# Altium PCB ftcan2.PcbDoc
Units mm, origin at the board's own origin, x right, y up, seen from the top; angles counter-clockwise.
Board outline 52 x 31 mm, 2 copper layers (Top Layer, Bottom Layer); 35 components, 33 nets, 184 pads, 46 vias.
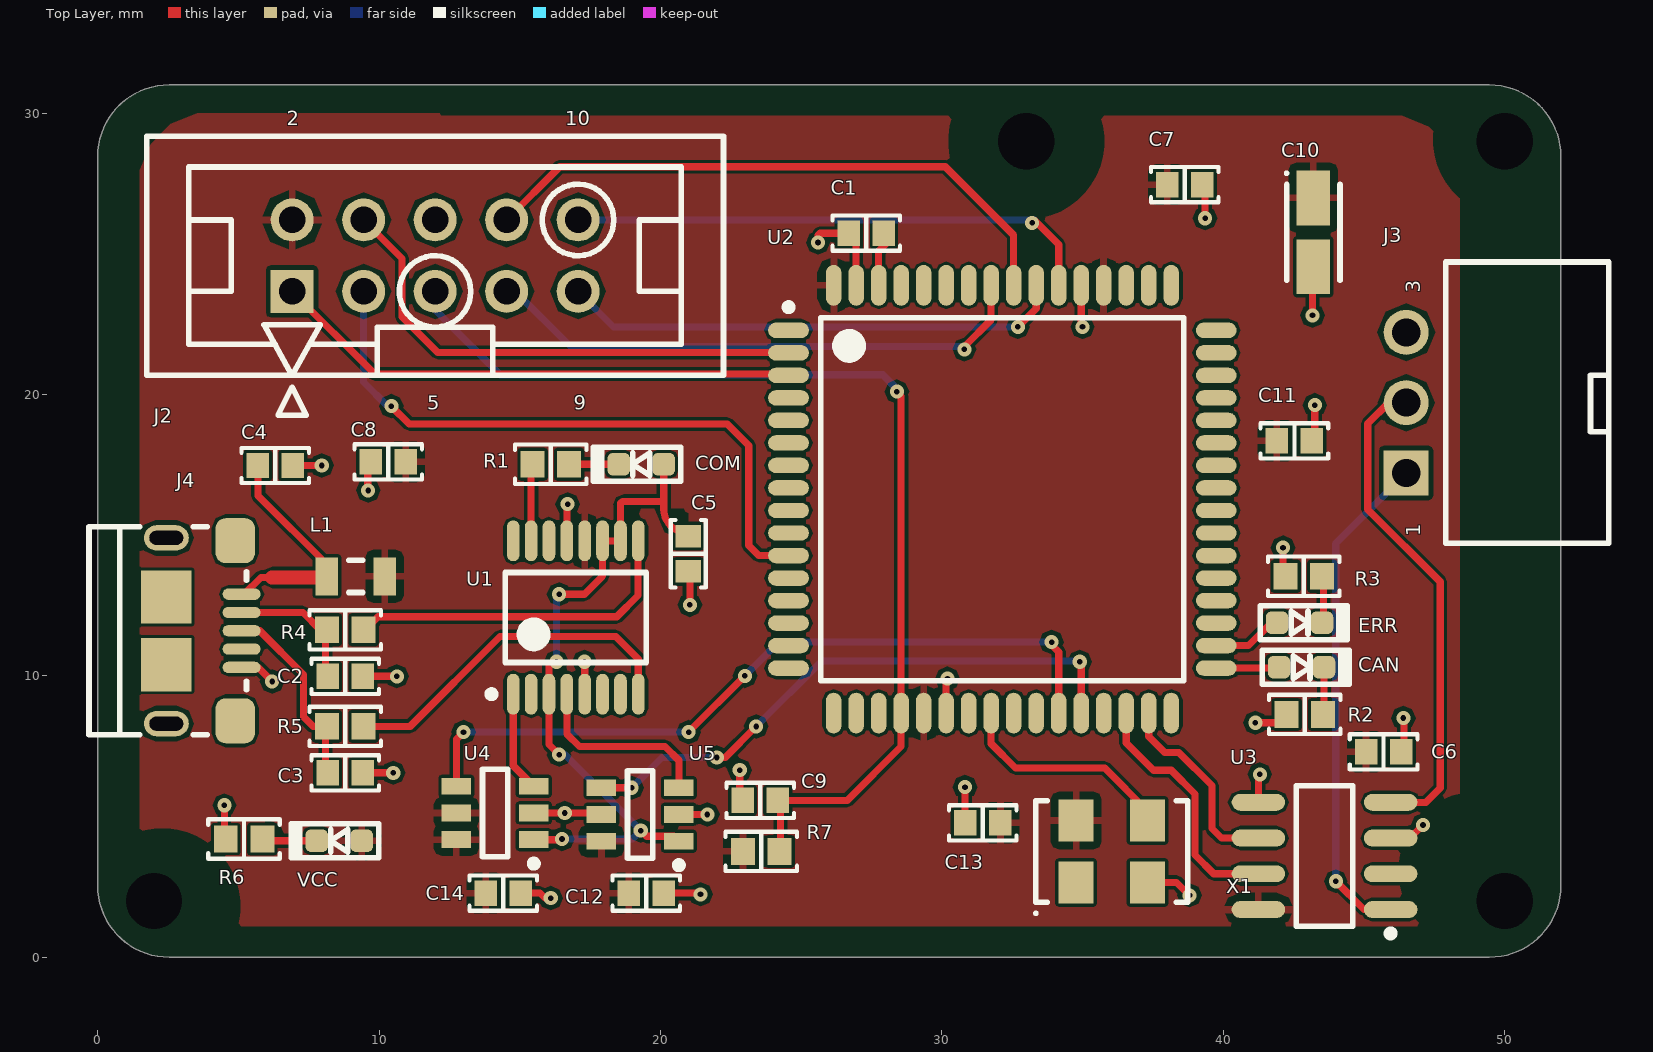
[diagram p0: Top Layer view]
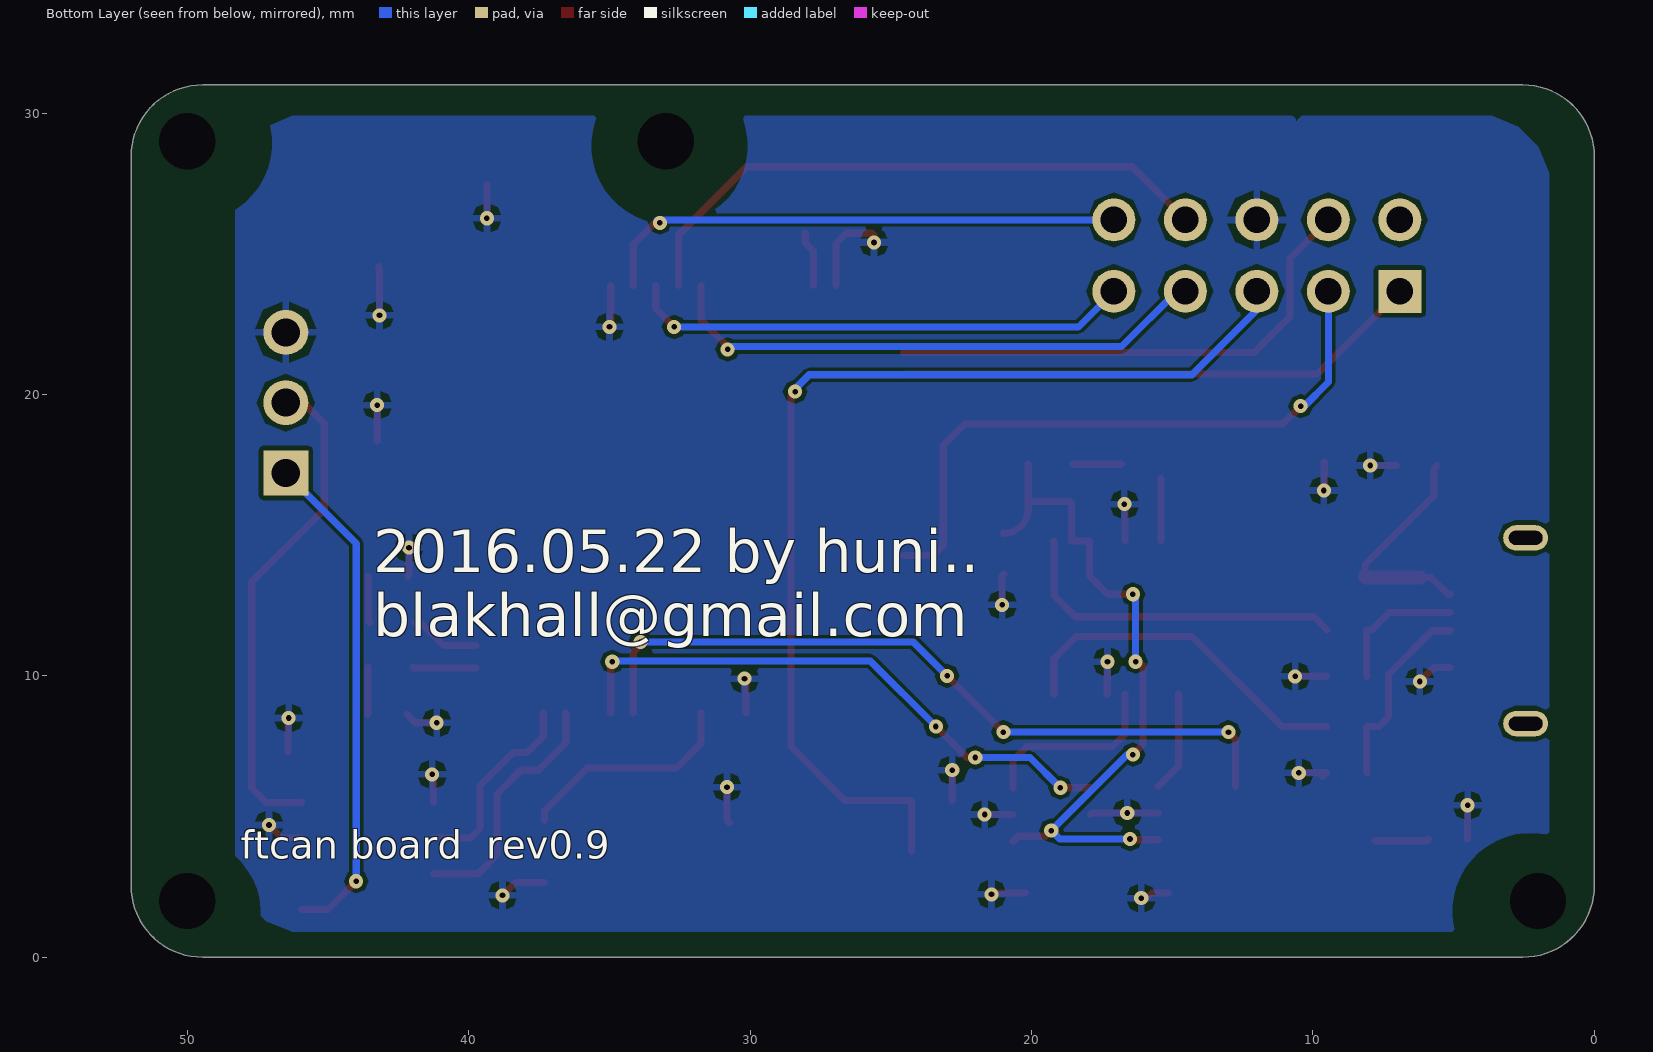
[diagram p1: Bottom Layer view, seen from below]
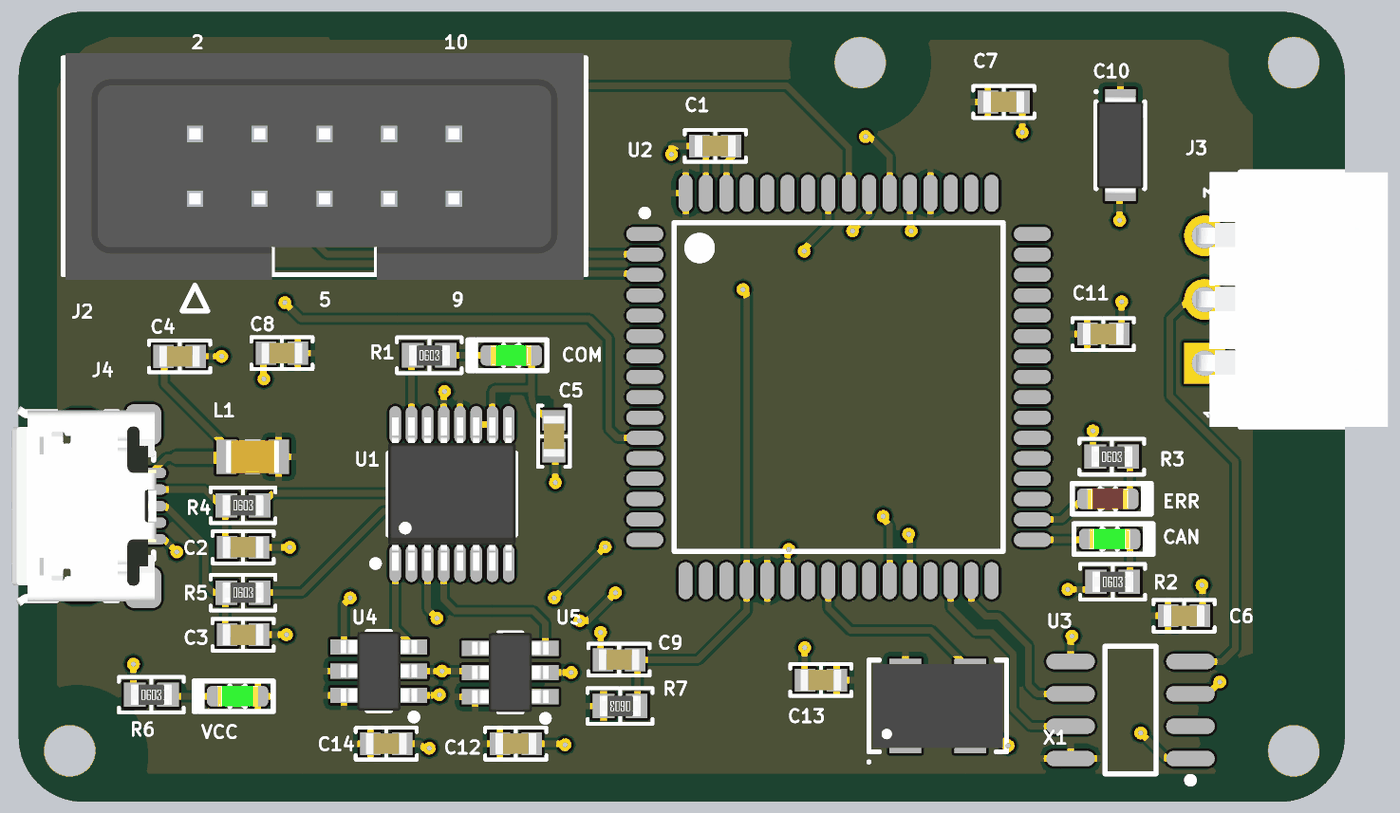
[diagram p2: 3D render of the assembled board from above, using the file's embedded part models]

## Layer stack, top to bottom
Top Solder: solder mask 0.0102, Solder Resist, Dk 3.5
Top Layer: signal copper 0.0356
Dielectric 1: dielectric 0.32, FR-4, Dk 4.8
Bottom Layer: signal copper 0.0356
Bottom Solder: solder mask 0.0102, Solder Resist, Dk 3.5

## Board outline
0,28.46 cw(c2.54,28.46) 2.54,31 49.46,31 cw(c49.46,28.46) 52,28.46 52,2.54 cw(c49.46,2.54) 49.46,0 2.54,0 cw(c2.54,2.54) 0,2.54

## Design rules (kind name [scope] priority, off if disabled: settings)
Clearance [All] p1: gap=0.1 ignorepadtopadclearanceinfootprint=FALSE except(0: Arc-Hole Track-Hole SMDPad-Hole THPad-Hole Via-Hole Fill-Hole Poly-Hole Region-Hole Text-Hole; 0.15: SMDPad-Text THPad-Fill THPad-Poly THPad-Region Via-Fill Via-Poly Via-Region)
MinimumSolderMaskSliver [All] p1 off: minsoldermaskwidth=0.254
PolygonConnect [All] p1: connectstyle=Relief reliefconductorwidth=0.254 reliefentries=4 polygonreliefangle="90 Angle" airgapwidth=0.254
RoutingVias RoutingVias_1 [All] p1: holewidth=0.2 width=0.5 viastyle="Through Hole" minholewidth=0.1 minwidth=0.1 maxholewidth=0.711 maxwidth=1.27
SilkToSilkClearance [All] p1: silktosilkclearance=0.1
SilkToSolderMaskClearance [IsPad] p1 off: minsilkscreentomaskgap=0.1 clearancetoexposedcopper=TRUE
SolderMaskExpansion [All] p1: expansion=0.102
Width [All] p1: maxlimit=10.254 minlimit=0.1 preferedwidth=0.254 minimp=50.000000 maximp=50.000000 favimp=50.000000
27 further rules are at their usual default settings.

## Components (designator, comment, footprint, x,y, rotation, side; value= is the part's Value field where it differs from the comment)
C1 "105" "CAP 0603/1608 RF" 27.315,25.731 r0 top
C2 "47pF" "CAP 0603/1608 RF" 8.798,9.983 r180 top
C3 "47pF" "CAP 0603/1608 RF" 8.798,6.554 r180 top
C4 "104" "CAP 0603/1608 RF" 6.311,17.476 r180 top
C5 "104" "CAP 0603/1608 RF" 20.987,14.34 r90 top
C6 "105" "CAP 0603/1608 RF" 45.7,7.3 r180 top
C7 "105" "CAP 0603/1608 RF" 38.629,27.458 r180 top
C8 "105" "CAP 0603/1608 RF" 10.322,17.603 r0 top
C9 "105" "CAP 0603/1608 RF" 23.543,5.574 r0 top
C10 "10uF/3216" CAPMP3216X18N 43.201,25.762 r90 top value=1n
C11 "105" "CAP 0603/1608 RF" 42.529,18.351 r180 top
C12 "105" "CAP 0603/1608 RF" 19.494,2.279 r180 top
C13 "105" "CAP 0603/1608 RF" 31.457,4.776 r0 top
C14 "105" "CAP 0603/1608 RF" 14.414,2.279 r180 top
CAN "G" LED-1608(Green) 41.982,10.307 r0 top
COM "G" LED-1608(Green) 20.115,17.519 r180 top
ERR "R" LED-1608(red) 41.911,11.888 r0 top
J2 "87759-10xx" HIF3F-10PA-2.54DSA 6.91,23.662 r0 top
J3 "SMW250-03" SMAW250-03P 46.503,17.208 r90 top
J4 "MICROUSB-B" "FCI USB 10118193-0001LF" 2.489,11.602 r90 top
L1 "1uH" CAPC2012X05N 9.17,13.539 r0 top
R1 "4.7k" "RES 0603/1608" 16.102,17.519 r0 top
R2 "4.7k" "RES 0603/1608" 42.899,8.629 r0 top
R3 "4.7k" "RES 0603/1608" 42.865,13.539 r0 top
R4 "27" "RES 0603/1608" 8.798,11.634 r0 top
R5 "27" "RES 0603/1608" 8.798,8.205 r0 top
R6 "4.7k" "RES 0603/1608" 5.2,4.2 r0 top
R7 "4.7k" "RES 0603/1608" 23.583,3.76 r180 top
U1 "FT230x" SOP64P600X178-16N 16.99,12.073 r90 top
U2 "AT90CAN128" 64A_L 32.152,16.276 r0 top
U3 "TJF1051T" 8S1_L 43.6,3.6 r180 top
U4 "74LVC1T45" SOT95P285X130-6N 14.123,5.127 r180 top
U5 "74LVC1T45" SOT95P285X130-6N 19.277,5.073 r180 top
VCC "G" LED-1608(Green) 9.382,4.141 r180 top
X1 "SCO53-16Mhz-5.0V" SCO-53 36.041,3.76 r90 top

## Footprints (in the part's own frame and the unit in brackets; to place one, negate y for a bottom-side part, rotate by r counter-clockwise, add the part's x,y. Pads: shape width x height; smd on the part's side, far side on the other; paste and mask are expansions set on the pad)
8S1_L [mm] "8-Pin Small Outline Integrated Circuit 1.27 mm Pitch, IPC High Density"
  oval 1.9x0.6 smd: 1(-2.35,1.905) 2(-2.35,0.635) 3(-2.35,-0.635) 4(-2.35,-1.905) 5(2.35,-1.905) 6(2.35,-0.635) 7(2.35,0.635) 8(2.35,1.905)
  silkscreen extent -2.48,-2.5 1,2.88, body extent -1.95,-2.45 1.95,2.45, height 1.73
64A_L [mm] "64-Pin Thin Quad Flat Pack 0.8 mm Pitch, IPC High Density"
  oval 1.45x0.55 smd: 1(-7.6,6) 2(-7.6,5.2) 3(-7.6,4.4) 4(-7.6,3.6) 5(-7.6,2.8) 6(-7.6,2) 7(-7.6,1.2) 8(-7.6,0.4) 9(-7.6,-0.4) 10(-7.6,-1.2) 11(-7.6,-2) 12(-7.6,-2.8) 13(-7.6,-3.6) 14(-7.6,-4.4) 15(-7.6,-5.2) 16(-7.6,-6) 33(7.6,-6) 34(7.6,-5.2) 35(7.6,-4.4) 36(7.6,-3.6) 37(7.6,-2.8) 38(7.6,-2) 39(7.6,-1.2) 40(7.6,-0.4) 41(7.6,0.4) 42(7.6,1.2) 43(7.6,2) 44(7.6,2.8) 45(7.6,3.6) 46(7.6,4.4) 47(7.6,5.2) 48(7.6,6)
  oval 0.55x1.45 smd: 17(-6,-7.6) 18(-5.2,-7.6) 19(-4.4,-7.6) 20(-3.6,-7.6) 21(-2.8,-7.6) 22(-2,-7.6) 23(-1.2,-7.6) 24(-0.4,-7.6) 25(0.4,-7.6) 26(1.2,-7.6) 27(2,-7.6) 28(2.8,-7.6) 29(3.6,-7.6) 30(4.4,-7.6) 31(5.2,-7.6) 32(6,-7.6) 49(6,7.6) 50(5.2,7.6) 51(4.4,7.6) 52(3.6,7.6) 53(2.8,7.6) 54(2,7.6) 55(1.2,7.6) 56(0.4,7.6) 57(-0.4,7.6) 58(-1.2,7.6) 59(-2,7.6) 60(-2.8,7.6) 61(-3.6,7.6) 62(-4.4,7.6) 63(-5.2,7.6) 64(-6,7.6)
  silkscreen extent -7.72,-6.45 6.45,6.95, body extent -7,-7 7,7, height 1.2
"CAP 0603/1608 RF" [mm] "Chip Capacitor, 2-Leads, Body 1.60x0.80mm, IPC High Density"
  rect 0.8x0.9 smd: 1(-0.625,0) 2(0.625,0)
  silkscreen extent -1.2,-0.63 1.2,0.63, body extent -0.8,-0.41 0.8,0.41, height 0.82
CAPC2012X05N [mm] "Chip Capacitor, 2-Leads, Body 2.00x1.20mm, IPC Medium Density"
  rect 0.8x1.35 smd: 1(-1.025,0) 2(1.025,0)
  silkscreen extent -0.25,-0.58 0.25,0.58, body extent -1.05,-0.65 1.05,0.65, height 0.5
CAPMP3216X18N [mm] "Molded Capacitor, 2-Leads, Body 3.20x1.60mm, IPC Medium Density"
  rect 1.95x1.2 smd: 1(1.225,0) 2(-1.225,0)
  silkscreen extent -1.7,-0.95 2.15,1, body extent -1.92,-0.9 1.92,0.9, height 1.8
"FCI USB 10118193-0001LF" [mm] "USB 2.0 Type B Micro"
  oval 0.4x1.35 smd: 1(1.3,-2.625) 2(0.65,-2.625) 3(0,-2.625) 4(-0.65,-2.625) 5(-1.3,-2.625)
  oval 0.9x1.6 hole 0.5 slot 1.2 at 90 deg: S(-3.3,0.05) S(3.3,0.05)
  rrect50% 1.6x1.4 smd: S(-3.2,-2.4) S(3.2,-2.4)
  rect 1.9x1.8 smd: S(-1.2,0.05) S(1.2,0.05)
  silkscreen extent -3.7,-2.8 3.7,2.8, body extent -3.93,-2.9 3.93,2.76, height 2.78
HIF3F-10PA-2.54DSA [mil]
  rect 60x60 hole 37: 1(0,0)
  round 60 hole 37: 2(0,100) 3(100,0) 4(100,100) 5(200,0) 6(200,100) 7(300,0) 8(300,100) 9(400,0) 10(400,100)
  silkscreen extent -204,-173 604,217, body extent -200,-125 600,225, height 352
LED-1608(Green) [mm]
  rrect50% 0.8x0.8 smd: 1(0,0) 2(1.6,0)
  silkscreen extent -0.6,-0.6 2.5,0.6, body extent 0,-0.4 1.6,0.4, height 0.78
LED-1608(red) [mm]
  rrect50% 0.8x0.8 smd: 1(0,0) 2(1.6,0)
  silkscreen extent -0.6,-0.6 2.5,0.6, body extent 0,-0.4 1.6,0.4, height 0.78
"RES 0603/1608" [mm] "Chip Resistor, 2-Leads, Body 1.60x0.80mm, IPC Medium Density"
  rect 0.85x0.95 smd: 1(-0.65,0) 2(0.65,0)
  silkscreen extent -1.27,-0.7 1.27,0.7, body extent -0.8,-0.4 0.8,0.4, height 0.45
SCO-53 [mm] "OSC, 4-Leads, Body 5.00x3.20mm, Pitch 2.54mm"
  rect 1.5x1.25 smd: 1(-1.1,1.27) 2(-1.1,-1.27) 3(1.1,-1.27) 4(1.1,1.27)
  silkscreen extent -2.25,-2.7 1.8,2.75, body extent -1.65,-2.55 1.65,2.55, height 1.3
SMAW250-03P [mm]
  rect 1.6x1.6 hole 1: 1(0,0)
  round 1.6 hole 1: 2(2.5,0) 3(5,0)
  silkscreen extent -2.5,-7.2 7.5,-1.4, body extent -2.5,-7.2 7.5,0.33, height 6.4
SOP64P600X178-16N [mm] "SOP, 16-Leads, Body 4.90x3.89mm, Pitch 0.635mm, IPC Medium Density"
  oval 1.45x0.45 smd: 1(-2.725,2.222) 2(-2.725,1.587) 3(-2.725,0.952) 4(-2.725,0.317) 5(-2.725,-0.318) 6(-2.725,-0.953) 7(-2.725,-1.588) 8(-2.725,-2.223) 9(2.725,-2.223) 10(2.725,-1.588) 11(2.725,-0.953) 12(2.725,-0.318) 13(2.725,0.317) 14(2.725,0.952) 15(2.725,1.587) 16(2.725,2.222)
  silkscreen extent -2.85,-2.5 1.6,3.12, body extent -3,-2.5 3,2.5, height 1.78
SOT95P285X130-6N [mm] "SOT23, 6-Leads, Body 3.00x2.85mm, Pitch 0.95mm, IPC Medium Density"
  rect 1.05x0.6 smd: 1(-1.375,0.95) 2(-1.375,0) 3(-1.375,-0.95) 4(1.375,-0.95) 5(1.375,0) 6(1.375,0.95)
  silkscreen extent -1.5,-1.55 0.45,1.92, body extent -1.5,-1.55 1.5,1.55, height 1.3

## Part data
C1 C2 C3 C4 C5 C6 C7 C8 C9 C11 C12 C13 C14: library part C_Dup1, CURRENT=CIMAX, MAX_TEMP=CTMAX, PSpiceTemplate="C^@REFDES %1 %2 ?TOLERANCE", VOLTAGE=CMAX, DIST=FLAT, KNEE=CBMAX, SLOPE=CSMAX, TC1=0, TC2=0
C10: library part C_elect, CURRENT=CIMAX, MAX_TEMP=CTMAX, NEGATIVE_VOLTAGE=CVN, POWER=CPMAX, PSpiceTemplate="C^@REFDES %+ %- ?TOLERANCE", VOLTAGE=CMAX, DIST=FLAT, ESR=ESR, KNEE=CBMAX, RTH=THERMR, SLOPE=CSMAX
CAN COM ERR VCC: library part LED_0, COMPFIXED=NO, COMPGROUP=0, COMPHEIGHT=0.025, COMPKEY=NO, COMPLOC=[-25.400,63.500], COMPLOCKED=NO, COMPROT=0, COMPSIDE=TOP, DECOUPLER=NO, MEMORY=NO
J2: library part CON10A
J3: library part CON3
J4: library part CON5
L1: library part L, CURRENT=LMAX, DIELECTRIC=DSMAX, PSpiceTemplate="L^@REFDES %1 %2 ?TOLERANCE", DIST=FLAT
R1 R2 R3 R6 R7: library part R_Dup1, MAX_TEMP=RTMAX, POWER=RMAX, PSpiceTemplate="R^@REFDES %1 %2 ?TOLERANCE", VOLTAGE=RVMAX, DIST=FLAT, SLOPE=RSMAX, TC1=0, TC2=0
R4 R5: library part R, MAX_TEMP=RTMAX, POWER=RMAX, PSpiceTemplate="R^@REFDES %1 %2 ?TOLERANCE", VOLTAGE=RVMAX, DIST=FLAT, SLOPE=RSMAX
U4 U5: library part 74LVC1T45_1
X1: library part OSCILLATOR_0

## Free pads (board coordinates)
  round 1.524 hole 2: hole(2,2) hole(33,29) hole(50,2) hole(50,29)

## Via types
v1: diameter 0.5, hole 0.2, Top Layer to Bottom Layer, 46 vias

## Nets (pads, with @x,y where several pads share a name; then routed paths per layer and width w, separated by ;. In a path a pad name is that pad's centre, name@x,y a point inside that pad or via, vN(x,y) a via of type N, cw(c..) or ccw(c..) an arc to the next point about the centre after c; other vN are vias at no path point)
CANH: J3.1 U3.1 | length 17.9
  Top Layer w0.254: v1(44,2.7) 45.005,1.695 U3.1
  Bottom Layer w0.254: v1(44,2.7) 44,14.705 J3.1
CANL: J3.2 U3.4 | length 17.7
  Top Layer w0.254: U3.4 45.955,5.5 47.2,5.5 47.71,6.01 47.71,13.342 45.137,15.915 45.137,18.963 45.882,19.708 J3.2
CANRX: U2.31 U3.6 | length 7.1
  Top Layer w0.254: U2.31 37.352,7.848 37.921,7.279 38.421,7.279 39.6,6.1 39.6,4.57 39.935,4.235 U3.6
CANTX: U2.30 U3.7 | length 9
  Top Layer w0.254: U2.30 36.552,7.609 37.517,6.644 38.156,6.644 39,5.8 39,3.63 39.665,2.965 U3.7
CLK_16M: U2.24 X1.3 | length 8
  Top Layer w0.254: U2.24 31.752,7.584 32.612,6.724 35.787,6.724 37.311,5.2 X1.3
GND: C1.1 C2.1 C3.1 C4.1 C5.1 C6.1 C7.1 C8.1 C9.1 C10.2 C11.1 C12.1 C13.1 C14.1 J2.6 J3.3 J4.5 R2.1 R3.1 R6.1 U1.5 U1.13 U2.22 U2.53 U2.63 U3.3 U3.5 U4.2 U5.2 U5.5 X1.2 | length 36.1
  Top Layer w0.254: R6.1@4.5,4.2 v1(4.5,5.4) ; J4.5 5.698,10.302 v1(6.2,9.8) ; C4.1@7.036,17.476 v1(7.962,17.476) ; C2.1@9.523,9.983 v1(10.629,9.983) ; C8.1@9.597,17.603 9.597,16.603 v1(9.613,16.587) ; C3.1@9.65,6.427 9.523,6.554 v1(10.502,6.554) ; C14.1@15.139,2.279 15.721,2.279 15.9,2.1 v1(16.1,2.1) ; U4.2 v1(16.599,5.127) 17.848,5.127 U5.5 ; U1.13 16.672,16.072 v1(16.7,16.1) ; v1(17.3,10.5) 17.307,10.493 U1.5 ; C12.1@20.219,2.279 21.381,2.279 v1(21.424,2.236) ; U5.2 v1(21.666,5.073) ; C5.1@20.987,13.615 21.043,13.559 v1(21.043,12.523) ; C9.1@22.818,5.574 v1(22.818,6.647) ; v1(25.6,25.4) 25.6,25.662 25.669,25.731 26.59,25.731 26.952,25.369 U2.63 ; U2.22 30.152,9.852 v1(30.2,9.9) ; C13.1@30.732,4.776 30.822,4.866 v1(30.822,6.046) ; U2.53 34.952,22.448 v1(35,22.4) ; X1.2 38.34,2.66 v1(38.8,2.2) ; v1(39.354,26.262) C7.1@39.354,27.458 ; v1(41.14,8.332) 41.902,8.332 R2.1@42.199,8.629 ; U3.5 41.25,6.45 v1(41.3,6.5) ; v1(42.125,14.555) 42.125,13.579 R3.1@42.165,13.539 ; v1(43.172,22.81) 43.172,24.508 C10.2 ; C11.1@43.254,18.351 v1(43.254,19.621) ; U3.3 46.635,4.235 v1(47.1,4.7) ; v1(46.4,8.5) 46.425,8.475 C6.1@46.425,7.3
LED0: CAN.1 U2.33 | length 2.2
  Top Layer w0.254: U2.33 41.951,10.276 CAN.1
LED1: ERR.1 U2.34 | length 2.5
  Top Layer w0.254: U2.34 40.901,11.076 41.713,11.888 ERR.1
NetC1_2: C1.2 U2.62 | length 2
  Top Layer w0.254: U2.62 27.752,25.09 28.04,25.378 C1.2@28.04,25.731
NetC2_2: C2.2 J4.2 R4.1 | length 4.9
  Top Layer w0.254: J4.2 7.291,12.252 7.909,11.634 8.098,11.634 8.098,10.008 C2.2@8.073,9.983
NetC3_2: C3.2 J4.3 R5.1 | length 6.9
  Top Layer w0.254: J4.3 5.761,11.602 7.317,10.046 7.317,8.543 7.655,8.205 8.098,8.205 8.098,6.579 C3.2@8.073,6.554
NetC4_2: C4.2 J4.1 L1.1 | length 8.3
  Top Layer w0.254: J4.1 5.202,12.902 5.8,13.5 6.2,13.5 ; C4.2@5.586,17.476 5.7,17.362 5.7,16.4 8.145,13.955 L1.1
  Top Layer w0.5: 6.2,13.5 8.106,13.5 L1.1
NetCAN_2: CAN.2 R2.2 | length 1.7
  Top Layer w0.254: CAN.2 43.582,8.646 R2.2@43.599,8.629
NetCOM_2: COM.2 R1.2 | length 1.7
  Top Layer w0.254: R1.2@16.802,17.519 COM.2
NetERR_2: ERR.2 R3.2 | length 1.7
  Top Layer w0.254: ERR.2 43.565,11.942 R3.2@43.565,13.539
NetR4_2: R4.2 U1.9 | length 12.2
  Top Layer w0.254: R4.2@9.498,11.634 9.964,12.1 18.445,12.1 19.198,12.853 19.198,14.784 U1.9
NetR5_2: R5.2 U1.8 | length 12.6
  Top Layer w0.254: R5.2@9.498,8.205 11.106,8.205 14.301,11.4 18.411,11.4 19.212,10.599 U1.8
NetR6_2: R6.2 VCC.2 | length 1.9
  Top Layer w0.254: R6.2@5.9,4.2 ccw(c5.959,4.2) 5.959,4.141 VCC.2
nRESET: C9.2 J2.5 R7.1 U2.20 | length 37.9
  Top Layer w0.254: R7.1@24.268,3.76 24.268,5.574 26.636,5.574 28.552,7.49 U2.20 28.552,19.948 v1(28.4,20.1)
  Bottom Layer w0.254: J2.5 11.99,23.01 14.3,20.7 27.9,20.7 28.4,20.2 v1(28.4,20.1)
RXD0: J2.4 U2.2 | length 18.3
  Top Layer w0.254: J2.4 10.816,24.836 10.816,22.759 12.086,21.489 24.539,21.489 U2.2
RXD1: U2.27 U4.4 | length 26.9
  Top Layer w0.254: U4.4 12.748,7.748 v1(13,8) ; v1(21,8) v1(23,10) ; v1(33.9,11.2) 33.9,11.1 34.152,10.848 U2.27
  Bottom Layer w0.254: v1(13,8) v1(21,8) ; v1(23,10) 24.2,11.2 v1(33.9,11.2)
RXD1*: U1.1 U4.3 | length 3.6
  Top Layer w0.254: U1.1 14.767,6.808 U4.3
SCK: J2.3 U2.11 | length 23
  Top Layer w0.254: v1(10.435,19.584) 11.07,18.949 22.373,18.949 23.135,18.187 23.135,14.631 23.49,14.276 U2.11
  Bottom Layer w0.254: J2.3 9.45,20.442 10.308,19.584 v1(10.435,19.584)
TCK: J2.7 U2.57 | length 19.9
  Top Layer w0.254: v1(30.8,21.6) 30.8,21.7 31.752,22.652 U2.57
  Bottom Layer w0.254: J2.7 14.838,23.662 16.8,21.7 30.8,21.7 v1(30.8,21.6)
TDI: J2.10 U2.54 | length 19.2
  Top Layer w0.254: v1(33.207,26.1) 33.295,26.188 34.152,25.331 U2.54
  Bottom Layer w0.254: J2.10 33.309,26.202 v1(33.207,26.1)
TDO: J2.9 U2.55 | length 17.9
  Top Layer w0.254: v1(32.7,22.4) 33.352,23.052 U2.55
  Bottom Layer w0.254: J2.9 18.332,22.4 v1(32.7,22.4)
TMS: J2.8 U2.56 | length 21.6
  Top Layer w0.254: J2.8 16.421,28.093 30.12,28.093 32.552,25.661 U2.56
TX_RX_LED: R1.1 U1.15 | length 2.2
  Top Layer w0.254: U1.15 15.402,17.011
TXD0: J2.1 U2.3 | length 18.9
  Top Layer w0.254: J2.1 9.845,20.727 24.501,20.727 U2.3
TXD1: U2.28 U5.4 | length 20.8
  Top Layer w0.254: U5.4 v1(18.977,6.023) ; v1(22,7.1) 22.3,7.1 v1(23.4,8.2) ; v1(34.9,10.5) 34.952,10.448 U2.28
  Bottom Layer w0.254: v1@19.023,6.023 v1(18.977,6.023) 20.054,7.1 v1(22,7.1) ; v1(23.4,8.2) 25.731,10.531 34.869,10.531 v1(34.9,10.5)
TXD1*: U1.4 U5.3 | length 6.8
  Top Layer w0.254: U1.4 16.672,7.932 17.118,7.486 20.166,7.486 20.652,7 U5.3
VCC: C6.2 C7.2 C8.2 C10.1 C11.2 C12.2 C13.2 C14.2 J2.2 L1.2 R7.2 U1.12 U2.21 U2.52 U2.64 U3.8 U4.5 U4.6 U5.6 VCC.1 X1.4
VCCIO: C5.2 COM.1 U1.3 U1.10 U1.11 U4.1 U5.1 | length 24.8
  Top Layer w0.254: U4.1 16.477,4.177 v1(16.5,4.2) ; 16.037,10.363 U1.3 16.037,7.563 v1(16.4,7.2) ; v1(16.4,12.9) 17.3,12.9 17.942,13.542 U1.11 U1.10 18.577,16.077 cw(c18.7,16.077) 18.7,16.2 20.115,16.2 ; v1(19.3,4.5) 19.5,4.3 20.475,4.3 U5.1 ; COM.1 20.115,16.2 ; C5.2@20.987,15.065 cw(c20.987,15.937) 20.115,15.937 20.115,16.2
  Bottom Layer w0.254: v1(16.3,10.5) 16.3,12.8 v1(16.4,12.9) ; v1(16.4,7.2) 16.6,7.2 v1(19.3,4.5) 19,4.2 v1(16.5,4.2)
pads on no net: J4.4 J4.S U1.2 U1.6 U1.7 U1.14 U1.16 U2.1 U2.4 U2.5 U2.6 U2.7 U2.8 U2.9 U2.10 U2.12 U2.13 U2.14 U2.15 U2.16 U2.17 U2.18 U2.19 U2.23 U2.25 U2.26 U2.29 U2.32 U2.35 U2.36 U2.37 U2.38 U2.39 U2.40 U2.41 U2.42 U2.43 U2.44 U2.45 U2.46 U2.47 U2.48 U2.49 U2.50 U2.51 U2.58 U2.59 U2.60 U2.61 U3.2 X1.1

## Polygon pours and split planes (outlines as drawn)
VCC on Top Layer "VCCTOP" (solid, pour order 0): 12.2,29.9 45.86,29.9 cw(c45.86,27.36) 48.4,27.36 48.4,2.7 cw(c46.8,2.7) 46.8,1.1 4.04,1.1 cw(c4.04,3.64) 1.5,3.64 1.5,27.46 cw(c4.04,27.46) 4.04,30 12.3,30
GND on Bottom Layer "GNDBOT" (solid, pour order 4): 10.6,29.7 cw(c10.8,29.7) 10.8,29.9 45.76,29.9 cw(c45.76,27.36) 48.3,27.36 48.3,3.44 cw(c45.76,3.44) 45.76,0.9 4.14,0.9 cw(c4.14,3.44) 1.6,3.44 1.6,27.36 cw(c4.14,27.36) 4.14,29.9 10.4,29.9

## Other copper
Top Layer:
  pour cut-out: 30.22,29 ccw(c33,29) 33,26.22 ccw(c33,29) 35.78,29 ccw(c33,29) 33,31.78 ccw(c33,29)
  pour cut-out: 47.451,29.064 ccw(c50.231,29.064) 50.231,26.284 ccw(c50.231,29.064) 53.012,29.064 ccw(c50.231,29.064) 50.231,31.844 ccw(c50.231,29.064)
  pour cut-out: 46.22,3.1 ccw(c49,3.1) 49,0.32 ccw(c49,3.1) 51.78,3.1 ccw(c49,3.1) 49,5.88 ccw(c49,3.1)
  pour cut-out: -0.48,1.8 ccw(c2.3,1.8) 2.3,-0.98 ccw(c2.3,1.8) 5.08,1.8 ccw(c2.3,1.8) 2.3,4.58 ccw(c2.3,1.8)
Bottom Layer:
  pour cut-out: 30.084,28.831 ccw(c32.864,28.831) 32.864,26.051 ccw(c32.864,28.831) 35.644,28.831 ccw(c32.864,28.831) 32.864,31.612 ccw(c32.864,28.831)
  pour cut-out: 47.384,1.531 ccw(c50.164,1.531) 50.164,-1.249 ccw(c50.164,1.531) 52.944,1.531 ccw(c50.164,1.531) 50.164,4.312 ccw(c50.164,1.531)
  pour cut-out: -0.516,1.631 ccw(c2.264,1.631) 2.264,-1.149 ccw(c2.264,1.631) 5.044,1.631 ccw(c2.264,1.631) 2.264,4.412 ccw(c2.264,1.631)
  pour cut-out: 46.984,28.931 ccw(c49.764,28.931) 49.764,26.151 ccw(c49.764,28.931) 52.544,28.931 ccw(c49.764,28.931) 49.764,31.712 ccw(c49.764,28.931)

## Silkscreen, mask and mechanical layers (free items; w line width, h text height)
Bottom Overlay:
  text "2016.05.22 by huni..  / blakhall@gmail.com" at 43.386,11.4 h1.52
  text "ftcan board  rev0.9" at 48.1,3.5 h1
Mechanical 1:
  the board outline again, w0.2

## Text inside footprints (layer, text, board x,y; h text height)
J2: Top Overlay "2" at 6.71,29.562 h0.5; Top Overlay "9" at 16.91,19.462 h0.5; Top Overlay "10" at 16.61,29.562 h0.5; Top Overlay "5" at 11.71,19.462 h0.5
J3: Top Overlay "3" at 47.003,23.608 h0.5 r90; Top Overlay "1" at 47.003,14.958 h0.5 r90